# Altium PCB viper_eagle_rep.PcbDoc (part 4 of 4)
Units mm, origin at the board's own origin, x right, y up, seen from the top; angles counter-clockwise.
Board outline 285.4 x 100.18 mm, 2 copper layers (Component Side, Bottom Layer), stack 1.571 mm thick; 351 components, 206 nets, 1213 pads, 248 vias.
Unrouted connection lines stored in the file: 357.
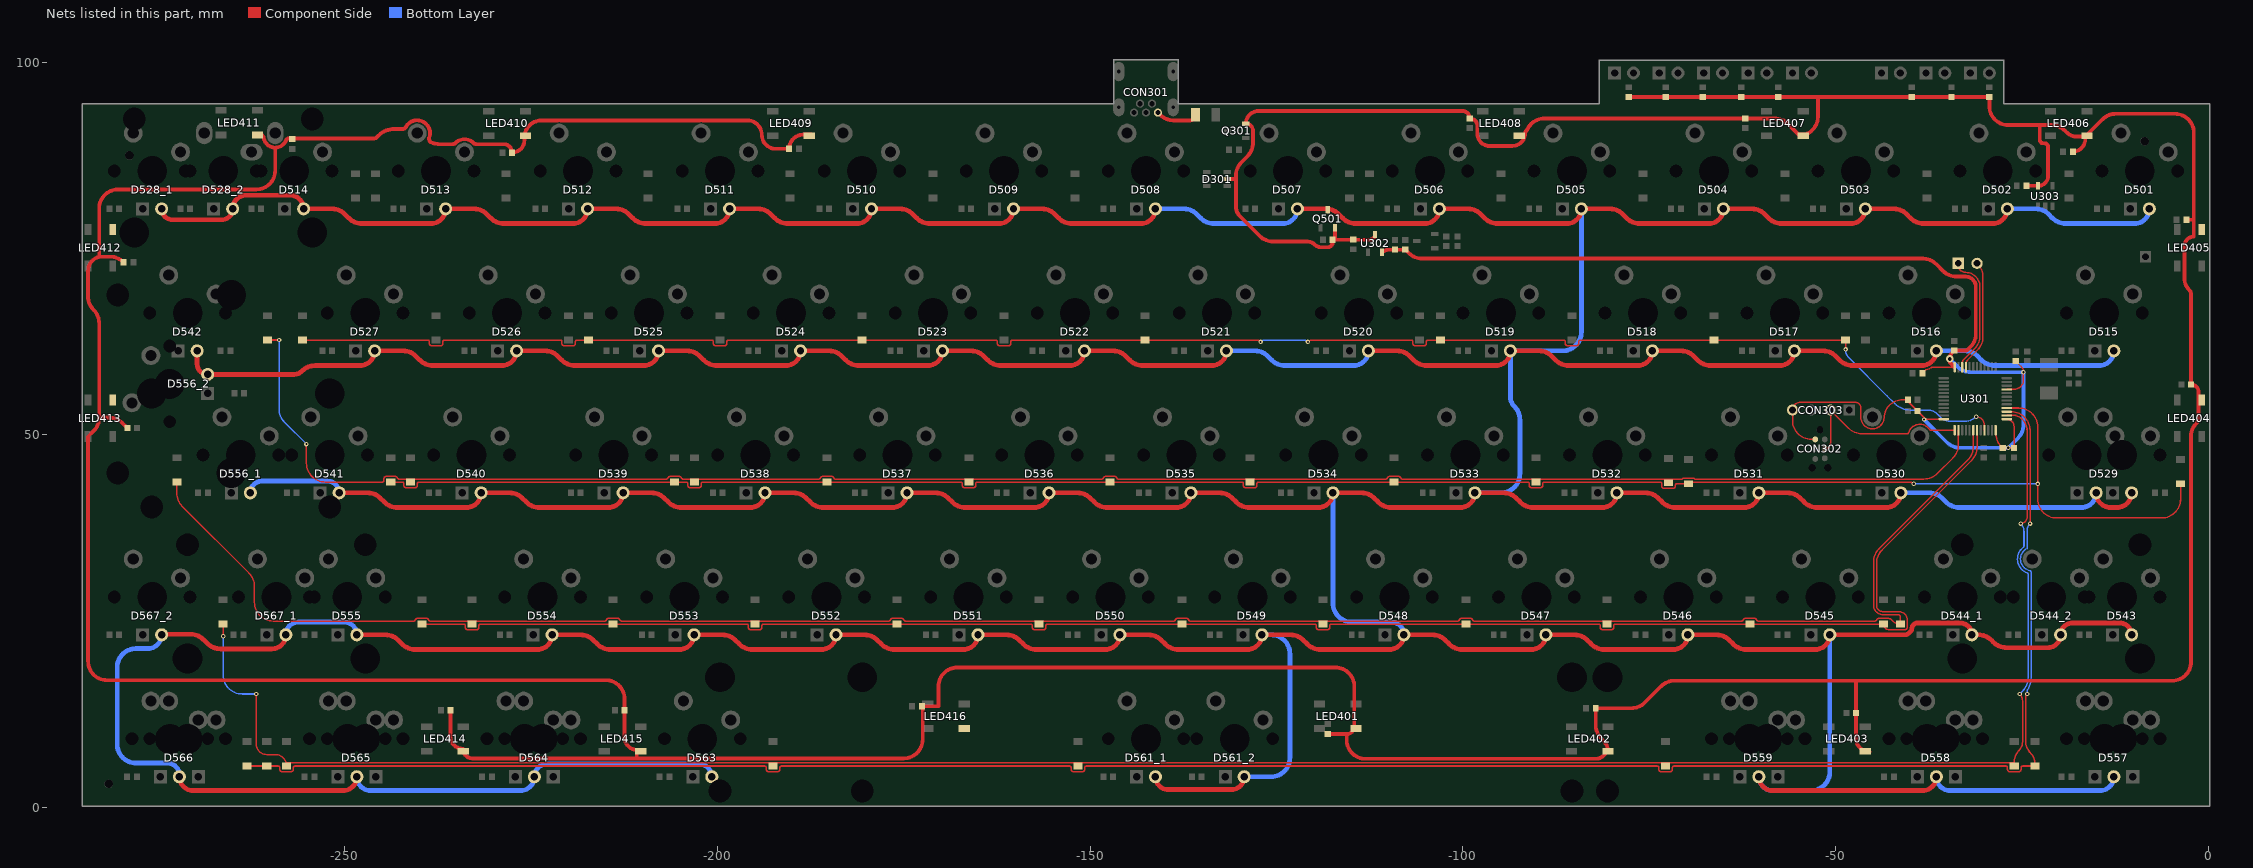
[diagram p3: the nets of this part, all layers, seen from the top]

## Via types
v1: diameter 0.6, hole 0.3, Component Side to Bottom Layer, tented both sides, 247 vias
v2: diameter 1, hole 0.5, Component Side to Bottom Layer, tented both sides, 1 vias

## Nets (pads, with @x,y where several pads share a name; then routed paths per layer and width w, separated by ;. In a path a pad name is that pad's centre, name@x,y a point inside that pad or via, vN(x,y) a via of type N, cw(c..) or ccw(c..) an arc to the next point about the centre after c; other vN are vias at no path point) (continued)
PA14/SWCLK: CON302.4 CON303.3 U301.37 | length 26.6
  Component Side w0.203: -50.673,48.895 cw(c-51.435,48.895) CON302.4@-51.435,48.133 ccw(c-51.435,48.917) -50.651,48.917 -50.651,52.981 cw(c-50.482,52.981) -50.482,53.149 -48.242,50.909 ccw(c-46.446,52.705) -46.446,50.165 -43.434,50.165 -40.376,50.165 ccw(c-40.376,50.368) -40.182,50.309 cw(c-38.677,49.855) -38.608,51.425 ; -39.857,50.893 cw(c-38.677,49.855) -38.608,51.425 ; U301.37@-33.992,50.639 -37.203,50.639 cw(c-37.203,50.842) -37.371,50.729 ccw(c-38.677,49.855) -38.608,51.425
PA15: D230.2 D232.2 D234.2 D236.2 D238.2 D240.2 D242.2 U301.38 | length 248.9
  Component Side w0.203: D242.2@-260.35,62.73 -260.35,62.738 v1(-258.826,62.738) ; v1(-255.143,48.768) -255.143,46.22 ccw(c-252.603,46.22) -252.603,43.68 -244.955,43.68 ccw(c-244.955,43.883) -244.752,43.883 -244.752,44.135 cw(c-244.45,44.135) -244.45,44.437 -243.23,44.437 cw(c-243.23,44.135) -242.942,44.225 ccw(c-242.748,44.286) -242.748,44.083 -242.518,44.083 -239.219,44.083 -238.379,44.083 -206.832,44.083 ccw(c-206.832,44.286) -206.638,44.225 cw(c-206.35,44.135) -206.35,44.437 -205.13,44.437 cw(c-205.13,44.135) -204.842,44.225 ccw(c-204.648,44.286) -204.648,44.083 -203.073,44.083 -196.469,44.083 -186.385,44.083 ccw(c-186.385,44.286) -186.191,44.225 cw(c-185.903,44.135) -185.903,44.437 -184.683,44.437 cw(c-184.683,44.135) -184.395,44.225 ccw(c-184.201,44.286) -184.201,44.083 -173.228,44.083 -169.037,44.083 -164.338,44.083 -148.412,44.083 ccw(c-148.412,44.286) -148.218,44.225 cw(c-147.93,44.135) -147.93,44.437 -146.71,44.437 cw(c-146.71,44.135) -146.422,44.225 ccw(c-146.228,44.286) -146.228,44.083 -144.018,44.083 -111.379,44.083 -110.311,44.083 ccw(c-110.312,44.286) -110.118,44.225 cw(c-109.83,44.135) -109.83,44.437 -108.61,44.437 cw(c-108.61,44.135) -108.322,44.225 ccw(c-108.128,44.286) -108.128,44.083 -102.108,44.083 -70.581,44.083 -70.458,44.207 -68.988,44.207 -68.865,44.083 -38.122,44.083 ccw(c-38.122,46.623) -36.326,44.827 -34.236,46.917 ccw(c-36.032,48.713) -33.492,48.713 U301.38@-33.492,50.639
  Bottom Layer w0.203: v1(-258.826,62.738) -258.826,53.503 ccw(c-256.286,53.503) -258.082,51.707 v1(-255.143,48.768)
PB6: D244.2 D246.2 D248.2 D250.2 D252.2 D254.2 D256.2 U301.42 | length 279
  Component Side w0.203: D256.2@-272.542,43.68 -272.542,42.2 ccw(c-270.002,42.2) -271.798,40.404 -262.872,31.478 cw(c-264.668,29.682) -262.128,29.682 -262.128,27.573 ccw(c-259.588,27.573) -259.588,25.033 -240.741,25.033 ccw(c-240.741,25.236) -240.547,25.175 cw(c-240.259,25.085) -240.259,25.387 -239.039,25.387 cw(c-239.039,25.085) -238.751,25.175 ccw(c-238.557,25.236) -238.557,25.033 -232.918,25.033 -228.473,25.033 -215.087,25.033 ccw(c-215.087,25.236) -214.893,25.175 cw(c-214.605,25.085) -214.605,25.387 -213.385,25.387 cw(c-213.385,25.085) -213.097,25.175 ccw(c-212.903,25.236) -212.903,25.033 -176.987,25.033 ccw(c-176.987,25.236) -176.793,25.175 cw(c-176.505,25.085) -176.505,25.387 -175.285,25.387 cw(c-175.285,25.085) -174.997,25.175 ccw(c-174.803,25.236) -174.803,25.033 -138.76,25.033 ccw(c-138.76,25.236) -138.566,25.175 cw(c-138.278,25.085) -138.278,25.387 -137.058,25.387 cw(c-137.058,25.085) -136.77,25.175 ccw(c-136.576,25.236) -136.576,25.033 -118.745,25.033 -105.156,25.033 -100.66,25.033 ccw(c-100.66,25.236) -100.466,25.175 cw(c-100.178,25.085) -100.178,25.387 -98.958,25.387 cw(c-98.958,25.085) -98.67,25.175 ccw(c-98.476,25.236) -98.476,25.033 -62.56,25.033 ccw(c-62.56,25.236) -62.366,25.175 cw(c-62.078,25.085) -62.078,25.387 -60.858,25.387 cw(c-60.858,25.085) -60.57,25.175 ccw(c-60.376,25.236) -60.376,25.033 -44.653,25.033 ccw(c-44.653,25.236) -44.459,25.175 cw(c-44.171,25.085) -44.171,25.387 -42.951,25.387 cw(c-42.951,24.681) -42.452,25.18 -42.291,25.019 ccw(c-41.352,25.958) -41.352,24.63 D244.2@-41.275,24.63 -41.275,25.551 ccw(c-41.609,25.551) -41.609,25.886 -43.609,25.886 cw(c-43.609,27.153) -44.876,27.153 -44.876,32.944 cw(c-42.336,32.944) -44.132,34.74 -32.236,46.636 ccw(c-34.032,48.432) -31.492,48.432 U301.42@-31.492,50.639
PB7: D243.2 D245.2 D247.2 D249.2 D251.2 D253.2 D267.2 U301.43 | length 240.4
  Component Side w0.203: D267.2@-239.649,24.63 -234.033,24.63 cw(c-234.033,24.427) -233.83,24.427 -233.83,24.175 ccw(c-233.528,24.175) -233.528,23.873 -232.308,23.873 ccw(c-232.308,24.175) -232.006,24.175 -232.006,24.427 cw(c-231.803,24.427) -231.803,24.63 D253.2@-213.995,24.63 -196.06,24.63 cw(c-196.06,24.427) -195.857,24.427 -195.857,24.175 ccw(c-195.555,24.175) -195.555,23.873 -194.335,23.873 ccw(c-194.335,24.175) -194.033,24.175 -194.033,24.427 cw(c-193.83,24.427) -193.83,24.63 D251.2@-175.895,24.63 -157.96,24.63 cw(c-157.96,24.427) -157.757,24.427 -157.757,24.175 ccw(c-157.455,24.175) -157.455,23.873 -156.235,23.873 ccw(c-156.235,24.175) -155.933,24.175 -155.933,24.427 cw(c-155.73,24.427) -155.73,24.63 D249.2@-137.668,24.63 -119.86,24.63 cw(c-119.86,24.427) -119.657,24.427 -119.657,24.175 ccw(c-119.355,24.175) -119.355,23.873 -118.135,23.873 ccw(c-118.135,24.175) -117.833,24.175 -117.833,24.427 cw(c-117.63,24.427) -117.63,24.63 D247.2@-99.568,24.63 -81.76,24.63 cw(c-81.76,24.427) -81.557,24.427 -81.557,24.175 ccw(c-81.255,24.175) -81.255,23.873 -80.035,23.873 ccw(c-80.035,24.175) -79.733,24.175 -79.733,24.427 cw(c-79.53,24.427) -79.53,24.63 D245.2@-61.468,24.63 D243.2@-43.561,24.63 ccw(c-42.804,24.63) -42.804,23.873 -40.665,23.873 ccw(c-40.665,24.175) -40.452,23.961 ccw(c-40.665,24.175) -40.451,23.962 ccw(c-40.665,24.175) -40.363,24.175 -40.363,25.21 ccw(c-41.442,25.21) -41.442,26.289 -43.609,26.289 cw(c-43.609,27.153) -43.678,26.292 cw(c-43.609,27.153) -44.473,27.153 -44.473,32.777 cw(c-41.933,32.777) -43.729,34.573 -31.736,46.566 ccw(c-33.532,48.362) -30.992,48.362 U301.43@-30.992,50.639
PB8: D215.2 D217.2 D219.2 D221.2 D223.2 D225.2 D227.2 U301.45 | length 239.7
  Component Side w0.203: D227.2@-255.651,62.73 -238.859,62.73 cw(c-238.859,62.527) -238.656,62.527 -238.656,62.275 ccw(c-238.354,62.275) -238.354,61.973 -237.134,61.973 ccw(c-237.134,62.275) -236.832,62.275 -236.832,62.611 cw(c-236.659,62.505) -236.749,62.687 cw(c-236.568,62.324) -236.568,62.73 -221.079,62.73 cw(c-221.079,62.527) -220.876,62.527 -220.876,62.275 ccw(c-220.574,62.275) -220.574,61.973 -219.354,61.973 ccw(c-219.354,62.275) -219.052,62.275 -219.052,62.527 cw(c-218.849,62.527) -218.849,62.73 D225.2@-217.297,62.73 -200.759,62.73 cw(c-200.759,62.527) -200.556,62.527 -200.556,62.275 ccw(c-200.254,62.275) -200.254,61.973 -199.034,61.973 ccw(c-199.034,62.275) -198.732,62.275 -198.732,62.527 cw(c-198.529,62.527) -198.529,62.73 D223.2@-180.594,62.73 -162.659,62.73 cw(c-162.659,62.527) -162.456,62.527 -162.456,62.275 ccw(c-162.154,62.275) -162.154,61.973 -160.934,61.973 ccw(c-160.934,62.275) -160.632,62.275 -160.632,62.527 cw(c-160.429,62.527) -160.429,62.73 D221.2@-142.621,62.73 -127.373,62.73 v1(-127.127,62.484) ; v1(-120.777,62.484) -120.67,62.484 -120.424,62.73 -106.906,62.73 cw(c-106.906,62.527) -106.703,62.527 -106.703,62.275 ccw(c-106.401,62.275) -106.401,61.973 -105.181,61.973 ccw(c-105.181,62.275) -104.879,62.275 -104.879,62.527 cw(c-104.676,62.527) -104.676,62.73 D219.2@-102.997,62.73 -86.459,62.73 cw(c-86.459,62.527) -86.256,62.527 -86.256,62.275 ccw(c-85.954,62.275) -85.954,61.973 -84.734,61.973 ccw(c-84.734,62.275) -84.432,62.275 -84.432,62.527 cw(c-84.229,62.527) -84.229,62.73 D217.2@-66.294,62.73 D215.2@-48.641,62.73 ; v1(-48.641,61.468) D215.2@-48.641,62.73 ; D215.2@-48.227,62.73 D215.2@-48.641,62.73 ; v1(-31.115,52.451) cw(c-31.115,51.347) -31.09,52.451 cw(c-31.115,51.347) -30.011,51.371 cw(c-31.115,51.347) -30.011,51.347 U301.45@-30.011,50.658
  Bottom Layer w0.203: v1(-127.127,62.484) -127.02,62.484 -126.788,62.716 -121.116,62.716 -120.884,62.484 v1(-120.777,62.484) ; v1(-48.641,61.468) ccw(c-47.049,61.468) -48.175,60.343 -43.065,55.233 -42.034,54.201 ccw(c-39.953,56.283) -39.953,53.34 -37.614,53.34 cw(c-37.614,51.54) -36.342,52.814 cw(c-37.614,51.54) -36.341,52.813 -35.843,52.314 ccw(c-34.639,53.518) -34.639,51.816 -32.648,51.816 ccw(c-32.648,53.984) v1(-31.115,52.451) ccw(c-32.648,53.984) v1(-31.115,52.451)
PB10: CON101.2 U301.21 | length 15.1
  Component Side w0.203: U301.21@-32.492,59.089 -32.492,59.506 cw(c-31.693,59.506) -32.473,59.677 cw(c-31.693,59.506) -32.258,60.071 -30.946,61.383 ccw(c-32.742,63.18) -30.202,63.18 -30.202,71.186 ccw(c-32.742,71.186) CON101.2@-30.946,72.983 ; CON101.2@-30.988,73.025 CON101.2@-30.946,72.983 ; CON101.2@-30.843,72.88 CON101.2@-30.946,72.983
PB11: CON101.1 U301.22 | length 17.2
  Component Side w0.203: CON101.1@-33.528,73.025 CON101.1@-33.528,73.023 ; U301.22@-32.992,59.089 -32.992,59.542 cw(c-32.11,59.542) -32.977,59.706 cw(c-32.11,59.542) -32.944,59.83 cw(c-32.11,59.542) -32.734,60.166 -31.349,61.55 ccw(c-33.145,63.347) -30.605,63.347 -30.605,69.872 ccw(c-32.536,69.872) -31.221,71.286 ccw(c-32.536,69.872) -32.536,71.803 cw(c-32.536,72.795) CON101.1@-33.394,72.296 ; CON101.1@-33.528,73.023 ccw(c-31.496,73.023) CON101.1@-33.394,72.296 ; CON101.1@-33.528,73.023 -33.528,72.795 ccw(c-32.536,72.795) CON101.1@-33.394,72.296
PC13: D255.2 D258.2 D259.2 D260.2 D261.2 D263.2 U301.2 | length 308.6
  Component Side w0.203: v1(-266.319,22.987) D255.2@-266.319,24.63 ; v1(-261.874,15.24) -261.874,8.509 ccw(c-260.477,8.509) -260.477,7.112 -259.342,7.112 cw(c-259.342,5.58) D263.2@-257.81,5.58 -257.81,5.983 D258.2@-26.001,5.983 ; U301.2@-27.017,52.614 -25.813,52.614 cw(c-25.812,52.411) -25.747,52.603 cw(c-26.416,50.574) -24.838,52.015 cw(c-26.416,50.574) -24.279,50.574 -24.279,38.967 cw(c-25.146,38.967) v1(-25.146,38.1) ; D258.2@-26,5.58 -26,6.171 cw(c-23.951,6.171) -25.4,7.62 ccw(c-26.626,8.846) -24.892,8.846 -24.892,14.32 ccw(c-26.193,14.32) v1(-25.273,15.24)
  Bottom Layer w0.203: v1(-266.319,22.987) -266.319,17.78 ccw(c-263.779,17.78) -263.779,15.24 v1(-261.874,15.24) ; v1(-25.273,15.24) -24.896,15.617 ccw(c-26.692,17.413) -24.152,17.413 -24.152,31.303 ccw(c-24.355,31.304) -24.285,31.494 cw(c-23.596,33.345) -24.776,34.929 ccw(c-24.897,35.092) -24.694,35.093 -24.694,37.009 ccw(c-26.237,37.009) v1(-25.146,38.1)
PC14: D257.2 D262.2 D264.2 U301.3 | length 296.5
  Component Side w0.203: D264.2@-263.144,5.58 D262.2@-260.477,5.58 -258.925,5.58 cw(c-258.925,5.377) -258.722,5.377 -258.722,5.125 ccw(c-258.42,5.125) -258.42,4.823 -257.2,4.823 ccw(c-257.2,5.125) -256.898,5.125 -256.898,5.377 cw(c-256.695,5.377) -256.695,5.58 -193.647,5.58 cw(c-193.647,5.377) -193.444,5.377 -193.444,5.125 ccw(c-193.142,5.125) -193.142,4.823 -191.922,4.823 ccw(c-191.922,5.125) -191.62,5.125 -191.62,5.377 cw(c-191.417,5.377) -191.417,5.58 -152.753,5.58 cw(c-152.753,5.377) -152.55,5.377 -152.55,5.125 ccw(c-152.248,5.125) -152.248,4.823 -151.028,4.823 ccw(c-151.028,5.125) -150.726,5.125 -150.726,5.377 cw(c-150.523,5.377) -150.523,5.58 -73.886,5.58 cw(c-73.886,5.377) -73.683,5.377 -73.683,5.125 ccw(c-73.381,5.125) -73.381,4.823 -72.161,4.823 ccw(c-72.161,5.125) -71.859,5.125 -71.859,5.377 cw(c-71.656,5.377) -71.656,5.58 -27.115,5.58 cw(c-27.115,5.377) -26.912,5.377 -26.912,5.125 ccw(c-26.61,5.125) -26.61,4.823 -25.39,4.823 ccw(c-25.39,5.125) -25.088,5.125 -25.088,5.377 cw(c-24.885,5.377) -24.885,5.58 D257.2@-23.241,5.58 -23.241,6.013 ccw(c-24.975,6.013) -23.749,7.239 -23.755,7.245 cw(c-21.982,9.017) -24.489,9.017 -24.489,14.68 cw(c-23.697,14.68) v1(-24.257,15.24) ; U301.3@-27.017,53.114 -26.416,53.114 cw(c-26.416,50.574) -23.876,50.574 v1(-23.876,38.1)
  Bottom Layer w0.203: v1(-24.257,15.24) -24.257,15.699 cw(c-24.054,15.699) -24.224,15.809 ccw(c-26.692,17.413) -23.749,17.413 -23.749,31.605 ccw(c-23.952,31.606) -23.911,31.805 cw(c-23.596,33.345) -24.291,34.755 -24.291,37.098 cw(c-22.874,37.098) v1(-23.876,38.1)
PC15: D229.2 D231.2 D233.2 D235.2 D237.2 D239.2 D241.2 U301.4 | length 267.4
  Component Side w0.203: D241.2@-243.84,43.68 -242.435,43.68 ; v1(-39.497,43.45) ccw(c-40.052,42.895) -40.052,43.68 -69.168,43.68 ccw(c-69.168,42.895) D231.2@-69.723,43.45 -71.275,43.45 ccw(c-71.275,43.247) -71.478,43.247 -71.478,43.122 cw(c-71.78,43.122) -71.78,42.82 -73,42.82 cw(c-73,43.122) -73.302,43.122 -73.302,43.477 ccw(c-73.505,43.477) -73.505,43.68 -89.055,43.68 ccw(c-89.055,43.477) -89.258,43.477 -89.258,43.225 cw(c-89.56,43.225) -89.56,42.923 -90.78,42.923 cw(c-90.78,43.225) -91.082,43.225 -91.082,43.477 ccw(c-91.285,43.477) -91.285,43.68 D233.2@-109.22,43.68 -127.409,43.68 ccw(c-127.409,43.477) -127.612,43.477 -127.612,43.225 cw(c-127.914,43.225) -127.914,42.923 -129.134,42.923 cw(c-129.134,43.225) -129.436,43.225 -129.436,43.477 ccw(c-129.639,43.477) -129.639,43.68 D235.2@-147.32,43.68 -165.128,43.68 ccw(c-165.128,43.477) -165.331,43.477 -165.331,43.225 cw(c-165.633,43.225) -165.633,42.923 -166.853,42.923 cw(c-166.853,43.225) -167.155,43.225 -167.155,43.477 ccw(c-167.358,43.477) -167.358,43.68 D237.2@-185.293,43.68 -201.958,43.68 ccw(c-201.958,43.477) -202.161,43.477 -202.161,43.225 cw(c-202.463,43.225) -202.463,42.923 -203.683,42.923 cw(c-203.683,43.225) -203.985,43.225 -203.985,43.477 ccw(c-204.188,43.477) -204.188,43.68 D239.2@-205.74,43.68 -240.058,43.68 ccw(c-240.058,43.477) -240.261,43.477 -240.261,43.225 cw(c-240.563,43.225) -240.563,42.923 -241.783,42.923 cw(c-241.783,43.225) -242.085,43.225 -242.085,43.464 ; U301.4@-27.017,53.614 -25.4,53.614 cw(c-25.4,51.074) -22.86,51.074 v1(-22.86,43.434) -22.86,41.402 ccw(c-20.32,41.402) -20.32,38.862 -6.223,38.862 ccw(c-6.223,41.402) -3.683,41.402 D229.2@-3.683,43.45 ; -242.435,43.68 cw(c-242.435,42.545) -242.255,43.666 cw(c-242.288,43.465) -242.085,43.466 ; -242.435,43.68 -242.288,43.68 cw(c-242.288,43.477) -242.085,43.477 -242.085,43.466 ; -242.085,43.464 ccw(c-242.288,43.465) -242.085,43.466 ; -242.085,43.464 -242.085,43.466
  Bottom Layer w0.203: v1(-39.497,43.45) v1@-22.86,43.45
RAW: CON301.1 F301.2 | length 5.8
  Component Side w0.508: CON301.1@-140.9,93.25 -140.588,92.938 ccw(c-138.811,94.715) -138.811,92.202 -136.605,92.202 ccw(c-136.605,92.964) F301.2@-135.843,92.964
VCC3V3: C301.2 C302.2 C303.2 C304.2 C305.2 C306.2 C311.2 C312.2 CON302.1 CON303.1 R302.1 U301.1 U301.9 U301.24 U301.36 U301.48 U302.2 | length 181.4
  Component Side w0.203: CON302.1@-52.705,49.403 -53.213,49.403 cw(c-53.213,51.943) -55.753,51.943 CON303.1@-55.753,53.34 cw(c-54.701,53.34) -54.701,54.392 -51.816,54.392 -48.884,54.392 -47.383,54.392 cw(c-47.383,53.596) -46.587,53.596 -46.587,52.604 cw(c-46.79,52.603) -46.588,52.579 ccw(c-45.027,52.395) -46.593,52.535 ccw(c-45.027,52.395) -46.593,52.533 ccw(c-45.027,52.395) -46.552,52.013 ccw(c-45.027,52.395) -45.511,50.9 ccw(c-45.027,52.395) -43.995,51.21 ; -44.406,50.952 ccw(c-45.027,52.395) -43.995,51.21 ; C304.2@-38.339,58.293 -37.926,58.706 cw(c-37.782,58.563) -37.829,58.761 ccw(c-38.431,61.285) -37.175,59.014 ccw(c-38.431,61.285) -37.095,59.06 cw(c-36.991,58.886) -36.994,59.089 U301.24@-33.992,59.089 ; U301.36@-35.467,52.114 -35.478,52.103 -37.889,52.103 -40.098,54.312 cw(c-39.673,54.737) R302.1@-40.274,54.737 -40.944,54.737 ccw(c-40.944,52.197) -43.459,52.556 ccw(c-43.258,52.527) -43.46,52.512 cw(c-45.027,52.395) -43.484,52.099 cw(c-45.027,52.395) -43.484,52.098 cw(c-45.027,52.395) -43.995,51.21 ; U301.48@-28.492,50.639 -28.492,50.26 ccw(c-25.952,50.26) -27.748,48.464 C312.2@-27.559,48.275 v1(-26.797,48.275) C305.2@-26.035,48.275 -26.035,51.132 ccw(c-27.017,51.132) U301.1@-27.017,52.114 ; U301.9@-27.017,56.114 -26.035,56.114 ccw(c-26.035,57.384) -25.652,56.173 ccw(c-26.035,57.384) -24.824,57.001 ccw(c-26.035,57.384) -24.765,57.384 v1(-24.765,58.42) ccw(c-25.861,58.42) -25.086,59.195 C303.2@-25.781,59.89 C303.2@-25.756,59.89
  Component Side w0.508: U302.2@-110.81,74.492 cw(c-109.919,73.601) -109.919,74.861 C311.2@-109.093,74.861 C302.2@-107.696,74.861 -107.239,74.404 ccw(c-105.443,76.2) -105.443,73.66 -38.263,73.66 cw(c-38.263,71.12) -37.804,73.618 cw(c-38.263,71.12) -36.467,72.916 -35.542,71.991 ccw(c-33.746,73.787) -33.746,71.247 -32.536,71.247 cw(c-32.536,69.872) -31.16,69.872 -31.16,63.509 cw(c-33.537,63.509) -31.856,61.828 -32.209,61.476 cw(c-32.569,61.834) -32.569,61.326 C306.2@-34.036,61.326 -34.322,61.04 ccw(c-33.481,60.198) v2(-34.671,60.198) -34.671,59.768 -34.163,59.26 ccw(c-33.992,59.26) U301.24@-34.096,59.124
  Bottom Layer w0.508: v1(-38.1,52.07) -35.049,49.019 ccw(c-33.253,50.815) -33.253,48.275 v1(-26.797,48.275) -25.509,49.563 ccw(c-27.305,51.359) -24.765,51.359 v1(-24.765,58.42) -31.841,58.42 cw(c-31.841,60.96) -33.637,59.164 v2(-34.671,60.198)
VCC5V: C310.2 C313.2 C401.2 C402.2 C403.2 C404.2 C405.2 C406.2 C407.2 C408.2 C409.2 C410.2 C411.2 C412.2 C413.2 C414.2 C415.2 C416.2 D301.5 LED401.1 LED402.1 LED403.1 LED404.1 LED405.1 LED406.1 LED407.1 LED408.1 LED409.1 LED410.1 LED411.1 LED412.1 LED413.1 LED414.1 LED415.1 LED416.1 Q301.2 Q501.2 R401.1 R402.1 R403.1 R404.1 R405.1 R406.1 R407.1 R408.1 R568.2 U302.3 U303.5 | length 849.1
  Component Side w0.508: C412.2@-279.669,73.152 -279.687,73.17 ccw(c-281.483,71.374) -281.483,73.914 -282.575,73.914 ; C413.2@-279.161,50.927 -279.812,51.578 ccw(c-281.608,49.782) -281.608,52.322 -282.956,52.322 ; LED411.1@-261.71,90.298 -261.381,90.298 cw(c-261.379,89.79) -260.877,89.865 ccw(c-259.34,90.095) -257.972,89.358 ; -259.334,88.519 -259.334,85.48 cw(c-261.874,85.48) -261.874,82.94 -280.416,82.94 ccw(c-280.416,80.4) -282.956,80.4 -282.956,74.041 ccw(c-282.829,74.041) -282.829,73.914 -282.575,73.914 ; -257.909,89.489 cw(c-257.441,89.291) -257.541,89.789 -255.27,89.789 -246.071,89.789 ccw(c-246.071,90.297) -245.685,89.967 cw(c-243.332,87.955) -245.227,90.403 cw(c-243.332,87.955) -243.332,91.051 -242.252,91.051 ccw(c-242.252,91.559) -241.806,91.317 cw(c-240.29,90.495) -239.833,92.157 cw(c-240.29,90.495) -238.67,89.905 ccw(c-238.193,89.731) -238.42,89.277 ccw(c-237.293,91.553) -237.293,89.013 -235.53,89.013 ccw(c-235.53,89.521) -235.168,89.165 cw(c-233.94,87.955) -232.712,89.165 ccw(c-232.35,89.521) -232.35,89.013 -230.796,89.013 -228.698,89.013 cw(c-228.698,87.884) C410.2@-227.569,87.884 ccw(c-227.569,89.557) -225.896,89.557 -225.896,89.917 cw(c-223.611,89.917) -223.611,92.202 -221.515,92.202 ccw(c-221.515,92.71) -221.452,92.206 cw(c-221.24,90.495) -221.028,92.206 ccw(c-220.965,92.71) -220.965,92.202 -202.465,92.202 ccw(c-202.465,92.71) -202.402,92.206 cw(c-202.19,90.495) -201.978,92.206 ccw(c-201.915,92.71) -201.915,92.202 -199.771,92.202 -195.961,92.202 cw(c-195.961,90.297) -194.056,90.297 ccw(c-192.151,90.297) -192.151,88.392 C409.2@-190.373,88.392 cw(c-188.467,88.392) -188.467,90.298 LED409.1@-187.415,90.298 ; C414.2@-235.824,13.081 -235.824,9.548 ccw(c-234.151,9.548) -235.79,9.214 ccw(c-234.151,9.548) -234.485,7.909 ccw(c-234.151,9.548) -234.151,7.875 ccw(c-232.88,7.875) -232.88,6.604 -210.82,6.604 ; D301.5@-131.594,84.328 -130.429,84.328 ; C401.2@-118.11,9.891 -115.597,9.891 cw(c-115.597,9.869) -115.575,9.869 ; Q501.2@-117.16,77.794 -117.16,76.5 cw(c-117.46,76.5) R568.2@-117.46,76.2 ; U302.3@-111.76,76.892 cw(c-112.452,76.892) -112.452,76.2 R568.2@-117.46,76.2 ; LED402.1@-80.519,7.565 ccw(c-82.496,7.565) -80.608,8.15 ; R408.1@-77.851,95.35 R407.1@-72.771,95.35 R406.1@-67.818,95.35 R405.1@-62.611,95.35 -52.324,95.35 ; LED403.1@-45.429,7.494 cw(c-45.429,9.309) -47.244,9.309 -47.244,17.018 ; C313.2@-24.369,83.439 -22.816,83.439 cw(c-22.816,83.417) U303.5@-22.794,83.417 ccw(c-22.794,84.748) -21.463,84.748 -21.463,88.632 ccw(c-21.971,88.632) -21.971,89.14 -22.123,89.14 cw(c-22.123,89.594) -22.577,89.594 -22.577,91.567 ; C406.2@-18.146,88.011 ccw(c-18.146,89.684) -16.473,89.684 LED406.1@-16.473,90.044 ; C405.2@-2.906,78.867 -1.906,78.867 ; -282.956,52.322 cw(c-285.496,52.322) -283.7,50.526 -284.479,49.747 cw(c-284.479,48.478) -284.45,49.747 -284.45,19.631 ccw(c-281.91,19.631) -281.91,17.091 -214.996,17.091 cw(c-214.996,14.551) -212.456,14.551 C415.2@-212.456,13.081 -212.456,9.421 ccw(c-210.783,9.421) -210.783,7.748 ccw(c-210.783,7.711) -210.82,7.711 -210.82,6.604 ; -282.956,52.322 -282.956,64.988 ccw(c-285.496,64.988) -283.7,66.784 -283.718,66.802 cw(c-281.951,68.569) -284.45,68.569 -284.45,71.718 -284.45,72.039 cw(c-282.575,72.039) -282.575,73.914 ; -210.82,6.604 -175.006,6.604 ccw(c-175.006,9.144) -172.466,9.144 -172.466,13.462 cw(c-172.34,13.462) -172.34,13.588 -170.344,13.588 -170.344,16.256 cw(c-167.804,16.256) -167.804,18.796 -117.094,18.796 cw(c-117.094,16.256) -114.554,16.256 -114.554,10.89 cw(c-115.575,10.89) -115.575,9.869 ; -130.429,84.328 -130.429,84.8 cw(c-127.889,84.8) -129.685,86.596 -128.887,87.394 ccw(c-130.683,89.19) -128.143,89.19 -128.143,90.796 ccw(c-129.102,90.796) Q301.2@-129.102,91.755 cw(c-127.385,91.755) -127.385,93.472 -100.061,93.472 cw(c-100.061,92.471) C408.2@-99.06,92.471 cw(c-99.06,91.455) -98.044,91.455 -98.044,90.424 ccw(c-96.393,90.424) -96.393,88.773 -93.349,88.773 ccw(c-93.349,90.505) -91.617,90.505 cw(c-91.111,90.469) -91.463,90.835 ccw(c-91.99,91.381) -91.308,91.049 cw(c-89.027,89.931) -91.005,91.524 cw(c-89.027,89.931) -89.027,92.471 C407.2@-62.103,92.471 -58.179,92.471 cw(c-58.179,89.931) -56.383,91.727 -54.954,90.298 -54.437,90.298 ccw(c-54.437,92.029) -53.213,90.805 -53.068,90.95 ccw(c-54.864,92.746) -52.327,92.625 ccw(c-54.864,92.746) -52.324,92.746 -52.324,95.35 ; -130.429,84.328 -130.429,80.601 ccw(c-128.695,80.601) -129.921,79.375 -127.236,76.69 ccw(c-125.44,78.486) -125.44,75.946 -120.808,75.946 cw(c-120.808,74.645) -119.888,75.565 ccw(c-118.968,76.485) -118.968,75.184 -118.11,75.184 ccw(c-118.11,75.834) -117.46,75.834 R568.2@-117.46,76.2 ; -115.575,9.869 -115.575,9.079 ccw(c-113.035,9.079) -113.035,6.539 -85.598,6.539 -84.206,6.539 -82.198,6.539 ccw(c-82.198,8.129) -80.608,8.129 -80.608,8.15 ; -80.608,8.15 ccw(c-82.496,7.565) -81.098,8.962 -81.41,9.274 cw(c-79.614,11.07) -82.154,11.07 C402.2@-82.154,13.335 -77.379,13.335 ccw(c-77.379,15.875) -75.583,14.079 -73.388,16.274 cw(c-71.592,14.478) -71.592,17.018 -47.244,17.018 ; -52.324,95.35 R403.1@-39.751,95.35 R401.1@-29.337,95.35 -29.337,94.107 ccw(c-26.797,94.107) -26.797,91.567 -22.577,91.567 ; -47.244,17.018 -4.826,17.018 ccw(c-4.826,19.558) -2.286,19.558 -2.286,49.902 cw(c-0.118,49.902) -1.651,51.435 ccw(c-2.568,52.352) -1.271,52.352 -1.271,55.769 ccw(c-2.271,55.769) C404.2@-2.271,56.769 -2.271,68.82 ccw(c-3.189,68.82) -2.54,69.469 cw(c-1.007,71.002) -3.175,71.002 -3.175,75.349 cw(c-1.906,75.349) -1.906,76.618 -1.906,78.867 ; -22.577,91.567 -20.991,91.567 cw(c-20.991,89.027) -19.195,90.823 -18.923,90.551 ccw(c-17.699,91.775) -17.699,90.044 LED406.1@-16.473,90.044 ; LED406.1@-16.473,90.044 -14.17,92.347 cw(c-12.374,90.551) -13.301,92.916 cw(c-12.374,90.551) -12.374,93.091 -4.446,93.091 cw(c-4.446,90.551) -1.906,90.551 -1.906,78.867
VCC_EXT: D501.1 D502.1 D503.1 D504.1 D505.1 D506.1 D507.1 D508.1 D509.1 D510.1 D511.1 D512.1 D513.1 D514.1 D515.1 D516.1 D517.1 D518.1 D519.1 D520.1 D521.1 D522.1 D523.1 D524.1 D525.1 D526.1 D527.1 D528_1.1 D528_2.1 D529.1 D530.1 D531.1 D532.1 D533.1 D534.1 D535.1 D536.1 D537.1 D538.1 D539.1 D540.1 D541.1 D542.1 D543.1 D544_1.1 D544_2.1 D545.1 D546.1 D547.1 D548.1 D549.1 D550.1 D551.1 D552.1 D553.1 D554.1 D555.1 D556_1.1 D556_2.1 D557.1 D558.1 D559.1 D561_1.1 D561_2.1 D563.1 D564.1 D565.1 D566.1 D567_1.1 D567_2.1 Q501.3 | length 1451.3
  Component Side w0.635: D528_1.1@-274.574,80.335 ccw(c-273.106,80.335) -273.106,78.867 -266.517,78.867 ccw(c-266.517,80.335) D528_2.1@-265.049,80.335 cw(c-263.215,80.335) -263.215,82.169 -257.364,82.169 cw(c-257.364,80.335) D514.1@-255.53,80.335 -251.704,80.335 cw(c-251.704,77.925) -250,79.629 -249.474,79.103 ccw(c-247.678,80.899) -247.678,78.359 -238.456,78.359 ccw(c-238.456,80.335) D513.1@-236.48,80.335 -232.654,80.335 cw(c-232.654,77.925) -230.95,79.629 -230.424,79.103 ccw(c-228.628,80.899) -228.628,78.359 -219.406,78.359 ccw(c-219.406,80.335) D512.1@-217.43,80.335 -213.604,80.335 cw(c-213.604,77.925) -211.9,79.629 -211.374,79.103 ccw(c-209.578,80.899) -209.578,78.359 -200.356,78.359 ccw(c-200.356,80.335) D511.1@-198.38,80.335 -194.554,80.335 cw(c-194.554,77.925) -192.85,79.629 -192.324,79.103 ccw(c-190.528,80.899) -190.528,78.359 -181.306,78.359 ccw(c-181.306,80.335) D510.1@-179.33,80.335 -175.504,80.335 cw(c-175.504,77.925) -173.8,79.629 -173.274,79.103 ccw(c-171.478,80.899) -171.478,78.359 -162.256,78.359 ccw(c-162.256,80.335) D509.1@-160.28,80.335 -156.454,80.335 cw(c-156.454,77.925) -154.75,79.629 -154.224,79.103 ccw(c-152.428,80.899) -152.428,78.359 -143.206,78.359 ccw(c-143.206,80.335) D508.1@-141.23,80.335 ; D567_2.1@-274.514,23.266 -270.688,23.266 cw(c-270.688,20.856) -268.983,22.56 -268.457,22.034 ccw(c-266.661,23.83) -266.661,21.29 -259.805,21.29 ccw(c-259.805,23.185) D567_1.1@-257.91,23.185 ; D566.1@-272.198,4.135 ccw(c-270.349,4.135) -270.349,2.286 -250.229,2.286 ccw(c-250.229,4.135) D565.1@-248.38,4.135 ; D542.1@-269.817,61.285 -269.817,59.532 ccw(c-268.4,59.532) D556_2.1@-268.4,58.115 -256.821,58.115 ccw(c-256.821,59.59) -255.778,58.547 -255.76,58.565 cw(c-253.964,56.769) -253.964,59.309 -247.981,59.309 ccw(c-247.981,61.285) D527.1@-246.005,61.285 -242.179,61.285 cw(c-242.179,58.875) -240.475,60.579 -239.949,60.053 ccw(c-238.153,61.849) -238.153,59.309 -228.931,59.309 ccw(c-228.931,61.285) D526.1@-226.955,61.285 -223.129,61.285 cw(c-223.129,58.875) -221.425,60.579 -220.899,60.053 ccw(c-219.103,61.849) -219.103,59.309 -209.881,59.309 ccw(c-209.881,61.285) D525.1@-207.905,61.285 -204.079,61.285 cw(c-204.079,58.875) -202.375,60.579 -201.849,60.053 ccw(c-200.053,61.849) -200.053,59.309 -190.831,59.309 ccw(c-190.831,61.285) D524.1@-188.855,61.285 -185.029,61.285 cw(c-185.029,58.875) -183.325,60.579 -182.799,60.053 ccw(c-181.003,61.849) -181.003,59.309 -171.781,59.309 ccw(c-171.781,61.285) D523.1@-169.805,61.285 -165.979,61.285 cw(c-165.979,58.875) -164.275,60.579 -163.749,60.053 ccw(c-161.953,61.849) -161.953,59.309 -152.731,59.309 ccw(c-152.731,61.285) D522.1@-150.755,61.285 -146.929,61.285 cw(c-146.929,58.875) -145.225,60.579 -144.699,60.053 ccw(c-142.903,61.849) -142.903,59.309 -133.681,59.309 ccw(c-133.681,61.285) D521.1@-131.705,61.285 ; D541.1@-250.767,42.235 D541.1@-250.761,42.235 -246.942,42.235 cw(c-246.942,39.825) -245.237,41.529 -244.711,41.003 ccw(c-242.915,42.799) -242.915,40.259 -233.694,40.259 ccw(c-233.694,42.235) D540.1@-231.717,42.235 -227.892,42.235 cw(c-227.892,39.825) -226.187,41.529 -225.661,41.003 ccw(c-223.865,42.799) -223.865,40.259 -214.644,40.259 ccw(c-214.644,42.235) D539.1@-212.667,42.235 -208.842,42.235 cw(c-208.842,39.825) -207.137,41.529 -206.611,41.003 ccw(c-204.815,42.799) -204.815,40.259 -195.594,40.259 ccw(c-195.594,42.235) D538.1@-193.617,42.235 -189.792,42.235 cw(c-189.792,39.825) -188.087,41.529 -187.561,41.003 ccw(c-185.765,42.799) -185.765,40.259 -176.544,40.259 ccw(c-176.544,42.235) D537.1@-174.567,42.235 -170.742,42.235 cw(c-170.742,39.825) -169.037,41.529 -168.511,41.003 ccw(c-166.715,42.799) -166.715,40.259 -157.494,40.259 ccw(c-157.494,42.235) D536.1@-155.517,42.235 -151.692,42.235 cw(c-151.692,39.825) -149.987,41.529 -149.461,41.003 ccw(c-147.665,42.799) -147.665,40.259 -138.444,40.259 ccw(c-138.444,42.235) D535.1@-136.467,42.235 -132.642,42.235 cw(c-132.642,39.825) -130.937,41.529 -130.411,41.003 ccw(c-128.615,42.799) -128.615,40.259 -119.394,40.259 ccw(c-119.394,42.235) D534.1@-117.417,42.235 -113.592,42.235 cw(c-113.592,39.825) -111.887,41.529 -111.361,41.003 ccw(c-109.565,42.799) -109.565,40.259 -100.344,40.259 ccw(c-100.344,42.235) D533.1@-98.367,42.235 -94.542,42.235 cw(c-94.542,39.825) -92.837,41.529 -92.311,41.003 ccw(c-90.515,42.799) -90.515,40.259 -81.294,40.259 ccw(c-81.294,42.235) D532.1@-79.317,42.235 -75.492,42.235 cw(c-75.492,39.825) -73.787,41.529 -73.261,41.003 ccw(c-71.465,42.799) -71.465,40.259 -62.244,40.259 ccw(c-62.244,42.235) D531.1@-60.267,42.235 -56.442,42.235 cw(c-56.442,39.825) -54.737,41.529 -54.211,41.003 ccw(c-52.415,42.799) -52.415,40.259 -43.194,40.259 ccw(c-43.194,42.235) D530.1@-41.217,42.235 ; D555.1@-248.385,23.185 -244.559,23.185 cw(c-244.559,20.775) -242.855,22.479 -242.329,21.953 ccw(c-240.533,23.749) -240.533,21.209 -224.168,21.209 ccw(c-224.168,23.185) D554.1@-222.192,23.185 -218.366,23.185 cw(c-218.366,20.775) -216.662,22.479 -216.136,21.953 ccw(c-214.34,23.749) -214.34,21.209 -205.118,21.209 ccw(c-205.118,23.185) D553.1@-203.142,23.185 -199.316,23.185 cw(c-199.316,20.775) -197.612,22.479 -197.086,21.953 ccw(c-195.29,23.749) -195.29,21.209 -186.068,21.209 ccw(c-186.068,23.185) D552.1@-184.092,23.185 -180.266,23.185 cw(c-180.266,20.775) -178.562,22.479 -178.036,21.953 ccw(c-176.24,23.749) -176.24,21.209 -167.018,21.209 ccw(c-167.018,23.185) D551.1@-165.042,23.185 -161.216,23.185 cw(c-161.216,20.775) -159.512,22.479 -158.986,21.953 ccw(c-157.19,23.749) -157.19,21.209 -147.968,21.209 ccw(c-147.968,23.185) D550.1@-145.992,23.185 -142.166,23.185 cw(c-142.166,20.775) -140.462,22.479 -139.936,21.953 ccw(c-138.14,23.749) -138.14,21.209 -128.918,21.209 ccw(c-128.918,23.185) D549.1@-126.942,23.185 -123.116,23.185 cw(c-123.116,20.775) -121.412,22.479 -120.886,21.953 ccw(c-119.09,23.749) -119.09,21.209 -109.868,21.209 ccw(c-109.868,23.185) D548.1@-107.892,23.185 -104.066,23.185 cw(c-104.066,20.775) -102.362,22.479 -101.836,21.953 ccw(c-100.04,23.749) -100.04,21.209 -90.818,21.209 ccw(c-90.818,23.185) D547.1@-88.842,23.185 -85.016,23.185 cw(c-85.016,20.775) -83.312,22.479 -82.786,21.953 ccw(c-80.99,23.749) -80.99,21.209 -71.768,21.209 ccw(c-71.768,23.185) D546.1@-69.792,23.185 -65.966,23.185 cw(c-65.966,20.775) -64.262,22.479 -63.736,21.953 ccw(c-61.94,23.749) -61.94,21.209 -52.718,21.209 ccw(c-52.718,23.185) D545.1@-50.742,23.185 -40.696,23.185 ccw(c-40.696,24.003) -40.171,23.375 cw(c-39.764,22.888) -40.157,23.387 ccw(c-40.54,23.873) -40.102,23.436 -39.926,23.612 ccw(c-40.363,24.05) -39.747,23.99 ccw(c-40.363,24.05) -39.745,24.033 cw(c-39.11,24.016) -39.735,24.129 cw(c-38.973,23.99) -38.973,24.765 -33.27,24.765 cw(c-33.27,23.185) D544_1.1@-31.69,23.185 -30.841,23.185 cw(c-30.841,20.645) -29.045,22.441 -28.811,22.207 ccw(c-27.015,24.003) -27.015,21.463 -21.508,21.463 ccw(c-21.508,23.185) D544_2.1@-19.786,23.185 cw(c-18.206,23.185) -18.206,24.765 -11.841,24.765 cw(c-11.841,23.185) D543.1@-10.261,23.185 ; D561_1.1@-141.229,4.135 ccw(c-139.507,4.135) -139.507,2.413 -131.045,2.413 ccw(c-131.045,4.135) D561_2.1@-129.323,4.135 ; D507.1@-122.18,80.335 -118.354,80.335 cw(c-118.354,77.925) -116.65,79.629 -116.124,79.103 ccw(c-114.328,80.899) -114.328,78.359 -105.106,78.359 ccw(c-105.106,80.335) D506.1@-103.13,80.335 -99.304,80.335 cw(c-99.304,77.925) -97.6,79.629 -97.074,79.103 ccw(c-95.278,80.899) -95.278,78.359 -86.056,78.359 ccw(c-86.056,80.335) D505.1@-84.08,80.335 -80.254,80.335 cw(c-80.254,77.925) -78.55,79.629 -78.024,79.103 ccw(c-76.228,80.899) -76.228,78.359 -67.006,78.359 ccw(c-67.006,80.335) D504.1@-65.03,80.335 -61.204,80.335 cw(c-61.204,77.925) -59.5,79.629 -58.974,79.103 ccw(c-57.178,80.899) -57.178,78.359 -47.956,78.359 ccw(c-47.956,80.335) D503.1@-45.98,80.335 -42.154,80.335 cw(c-42.154,77.925) -40.45,79.629 -39.924,79.103 ccw(c-38.128,80.899) -38.128,78.359 -28.906,78.359 ccw(c-28.906,80.335) D502.1@-26.93,80.335 ; D520.1@-112.655,61.285 -108.829,61.285 cw(c-108.829,58.875) -107.125,60.579 -106.599,60.053 ccw(c-104.803,61.849) -104.803,59.309 -95.581,59.309 ccw(c-95.581,61.285) D519.1@-93.605,61.285 -89.779,61.285 cw(c-89.779,58.875) -88.075,60.579 -87.549,60.053 ccw(c-85.753,61.849) -85.753,59.309 -76.531,59.309 ccw(c-76.531,61.285) D518.1@-74.555,61.285 -70.729,61.285 cw(c-70.729,58.875) -69.025,60.579 -68.499,60.053 ccw(c-66.703,61.849) -66.703,59.309 -57.481,59.309 ccw(c-57.481,61.285) D517.1@-55.505,61.285 -51.679,61.285 cw(c-51.679,58.875) -49.975,60.579 -49.449,60.053 ccw(c-47.653,61.849) -47.653,59.309 -38.431,59.309 ccw(c-38.431,61.285) D516.1@-36.455,61.285 ; D559.1@-60.267,4.135 ccw(c-58.418,4.135) -58.418,2.286 -38.298,2.286 ccw(c-38.298,4.135) D558.1@-36.449,4.135 ; D529.1@-15.024,42.235 ccw(c-13.048,42.235) -13.048,40.259 -12.237,40.259 ccw(c-12.237,42.235) D529.1@-10.261,42.235
  Bottom Layer w0.635: D567_2.1@-274.58,23.185 cw(c-276.429,23.185) -276.429,21.336 -278.003,21.336 ccw(c-278.003,18.796) -280.543,18.796 -280.543,8.509 ccw(c-278.003,8.509) -278.003,5.969 -273.812,5.969 cw(c-273.812,4.355) -272.198,4.355 D566.1@-272.198,4.135 ; D556_1.1@-262.68,42.235 cw(c-261.1,42.235) -261.1,43.815 -252.341,43.815 cw(c-252.341,42.235) D541.1@-250.761,42.235 ; D567_1.1@-257.91,23.185 cw(c-256.203,23.185) -256.203,24.892 -250.092,24.892 cw(c-250.092,23.185) D555.1@-248.385,23.185 ; D565.1@-248.391,4.135 ccw(c-246.542,4.135) -246.542,2.286 -226.422,2.286 ccw(c-226.422,4.135) D564.1@-224.573,4.135 cw(c-222.866,4.135) -222.866,5.842 -202.468,5.842 cw(c-202.468,4.135) D563.1@-200.761,4.135 ; D508.1@-141.23,80.335 -137.404,80.335 cw(c-137.404,77.925) -135.7,79.629 -135.174,79.103 ccw(c-133.378,80.899) -133.378,78.359 -124.156,78.359 ccw(c-124.156,80.335) D507.1@-122.18,80.335 ; D521.1@-131.705,61.285 -127.879,61.285 cw(c-127.879,58.875) -126.175,60.579 -125.649,60.053 ccw(c-123.853,61.849) -123.853,59.309 -114.631,59.309 ccw(c-114.631,61.285) D520.1@-112.655,61.285 ; D561_2.1@-129.323,4.135 -125.73,4.135 ccw(c-125.73,6.675) -123.19,6.675 -123.19,20.645 ccw(c-125.73,20.645) -125.73,23.185 D549.1@-126.942,23.185 ; D534.1@-117.417,42.235 -117.417,27.432 ccw(c-114.877,27.432) -114.877,24.892 -109.599,24.892 cw(c-109.599,23.185) D548.1@-107.892,23.185 ; D533.1@-98.367,42.235 -94.869,42.235 ccw(c-94.869,44.775) -92.329,44.775 -92.329,52.034 ccw(c-94.869,52.034) -93.073,53.83 -93.091,53.848 cw(c-91.85,55.089) -93.605,55.089 D519.1@-93.605,61.285 -86.62,61.285 ccw(c-86.62,63.825) -84.08,63.825 D505.1@-84.08,80.335 ; D559.1@-60.267,4.135 ccw(c-58.418,4.135) -58.418,2.286 -53.282,2.286 ccw(c-53.282,4.826) -50.742,4.826 D545.1@-50.742,23.185 ; D530.1@-41.217,42.235 -37.392,42.235 cw(c-37.392,39.825) -35.687,41.529 -35.161,41.003 ccw(c-33.365,42.799) -33.365,40.259 -17,40.259 ccw(c-17,42.235) D529.1@-15.024,42.235 ; D558.1@-36.46,4.135 ccw(c-34.611,4.135) -34.611,2.286 -14.492,2.286 ccw(c-14.492,4.135) D557.1@-12.642,4.135 ; D516.1@-36.455,61.285 -32.629,61.285 cw(c-32.629,58.875) -30.925,60.579 -30.399,60.053 ccw(c-28.603,61.849) -28.603,59.309 -14.619,59.309 ccw(c-14.619,61.285) D515.1@-12.642,61.285 ; D502.1@-26.93,80.335 -23.104,80.335 cw(c-23.104,77.925) -21.4,79.629 -20.874,79.103 ccw(c-19.078,80.899) -19.078,78.359 -9.856,78.359 ccw(c-9.856,80.335) D501.1@-7.88,80.335
pads on no net: CON301.4 CON302.0 CON302.3 CON302.6 D301.1 D301.6 D401. D402. D403. D404. D405. D406. D407. D408. D501. D502. D503. D504. D505. D506. D507. D508. D509. D510. D511. D512. D513. D514. D515. D516. D517. D518. D519. D520. D521. D522. D523. D524. D525. D526. D527. D528_1. D528_2. D529. D530. D531. D532. D533. D534. D535. D536. D537. D538. D539. D540. D541. D542. D543. D544_1. D544_2. D545. D546. D547. D548. D549. D550. D551. D552. D553. D554. D555. D556_1. D556_2. D557. D558. D559. D561_1. D561_2. D563. D564. D565. D566. D567_1. D567_2. S201. S202. S203. S204. S205. S206. S207. S208. S209. S210. S211. S212. S213. S214. S215. S216. S217. S218. S219. S220. S221. S222. S223. S224. S225. S226. S227. S228. S229. S230. S231. S232. S233. S234. S235. S236. S237. S238. S239. S240. S241. S242. S243. S244. S245. S246. S247. S248. S249. S250. S251. S252. S253. S254. S255. S256. S257. S258. S259. S260. S261. S262. S263. S264. S267. U301.15 U301.16
copper on no net: | length 1.2
  Component Side w0.203: -255.37,30.805 ccw(c-255.37,32.338) -254.286,31.254

## Other copper
Component Side:
  pour cut-out: -282.851,0.665 ccw(c-282.85,2.215) -282.85,0.665 -276.189,0.665 cw(c-272.7,-0.52) -269.211,0.665 -189.389,0.665 cw(c-185.9,-0.52) -182.411,0.665 -102.589,0.665 cw(c-99.1,-0.52) -95.511,0.317 cw(c-95.95,0.215) -95.5,0.215 cw(c-95.95,0.215) -96.389,0.113 ccw(c-99.1,-0.52) -101.811,0.115 ccw(c-99.1,-0.52) -101.811,0.113 -101.811,0.115 cw(c-102.25,0.215) -102.25,-0.235 -182.75,-0.235 cw(c-182.75,0.215) -183.189,0.114 cw(c-185.9,-0.52) -183.189,0.113 -183.189,0.114 ccw(c-185.9,-0.52) -188.611,0.113 cw(c-189.05,0.215) -189.05,-0.235 -269.55,-0.235 cw(c-269.55,0.215) -269.989,0.113 ccw(c-272.7,-0.52) -275.411,0.114 ccw(c-272.7,-0.52) -275.411,0.113 -275.411,0.114 cw(c-275.85,0.215) -275.85,-0.235 -282.85,-0.235 cw(c-282.85,2.215) -285.3,2.215 -285.3,40.767 cw(c-284.85,40.767) -285.3,40.769 -285.3,92.415 cw(c-282.85,92.415) -282.85,94.865 cw(c-282.85,94.415) -282.848,94.865 -275.85,94.865 cw(c-275.85,94.415) -275.411,94.516 ccw(c-272.7,95.149) -269.988,94.517 cw(c-269.55,94.415) -269.55,94.865 -189.05,94.865 cw(c-189.05,94.415) -188.611,94.517 ccw(c-185.9,95.149) -183.189,94.516 ccw(c-185.9,95.149) -183.189,94.517 -183.189,94.516 cw(c-182.75,94.415) -182.75,94.865 -102.25,94.865 cw(c-102.25,94.415) -101.811,94.516 cw(c-99.1,95.149) -101.811,94.517 -101.811,94.516 ccw(c-99.1,95.149) -96.389,94.517 cw(c-95.95,94.415) -95.95,94.865 -13.477,94.865 cw(c-13.477,94.415) -13.038,94.516 cw(c-10.327,95.149) -13.038,94.517 -13.038,94.516 ccw(c-10.327,95.149) -7.616,94.517 cw(c-7.177,94.415) -7.164,94.865 cw(c-7.15,94.415) -7.15,94.865 -2.15,94.865 cw(c-2.15,92.415) 0.3,92.415 0.3,39.065 cw(c-0.15,39.065) 0.3,39.062 0.3,2.215 cw(c-2.15,2.215) -2.15,-0.235 -9.15,-0.235 cw(c-9.15,0.215) -9.589,0.113 ccw(c-12.3,-0.52) -15.011,0.113 cw(c-15.45,0.215) -15.889,0.317 cw(c-12.3,-0.52) -8.811,0.665 -2.15,0.665 ccw(c-2.15,2.215) -0.6,2.215 -0.6,39.37 cw(c-0.15,39.37) -0.6,39.373 -0.6,92.415 ccw(c-2.15,92.415) -2.15,93.965 -6.838,93.965 cw(c-10.327,95.149) -13.816,93.965 -95.611,93.965 cw(c-99.1,95.149) -102.589,93.965 -182.411,93.965 cw(c-185.9,95.149) -189.389,93.965 -269.211,93.965 cw(c-272.7,95.149) -276.189,93.965 -282.85,93.965 cw(c-282.85,94.415) -282.851,93.965 cw(c-282.85,92.415) -282.85,93.965 -282.851,93.965 ccw(c-282.85,92.415) -284.4,92.416 cw(c-284.85,92.415) -284.4,92.415 -284.4,39.065 cw(c-284.85,39.065) -284.4,39.063 -284.4,2.215 ccw(c-282.85,2.215)
  pour cut-out: -95.95,-0.235 cw(c-95.95,0.215) -95.95,0.665 -15.45,0.665 cw(c-15.45,0.215) -15,0.215 cw(c-15.45,0.215) -15.45,-0.235
  pour cut-out: -13.837,94.342 ccw(c-10.3,95.149) -6.754,94.388 ccw(c-6.878,94.415) -6.751,94.415 ccw(c-6.878,94.415) -6.878,94.542 -13.668,94.542 ccw(c-13.668,94.415) -13.777,94.48 ccw(c-13.713,94.37)
  pour cut-out: -276.23,94.342 ccw(c-272.694,95.149) -269.147,94.388 ccw(c-269.272,94.415) -269.144,94.415 ccw(c-269.272,94.415) -269.272,94.542 -276.061,94.542 ccw(c-276.061,94.415) -276.171,94.48 ccw(c-276.106,94.37)
  pour cut-out: -189.43,94.342 ccw(c-185.894,95.149) -182.347,94.388 ccw(c-182.472,94.415) -182.344,94.415 ccw(c-182.472,94.415) -182.472,94.542 -189.261,94.542 ccw(c-189.261,94.415) -189.371,94.48 ccw(c-189.306,94.37)
  pour cut-out: -102.63,94.342 ccw(c-99.094,95.149) -95.547,94.388 ccw(c-95.672,94.415) -95.544,94.415 ccw(c-95.672,94.415) -95.672,94.542 -102.461,94.542 ccw(c-102.461,94.415) -102.571,94.48 ccw(c-102.506,94.37)
  pour cut-out: -269.158,0.288 ccw(c-272.694,-0.519) -276.241,0.242 ccw(c-276.116,0.215) -276.244,0.215 ccw(c-276.116,0.215) -276.116,0.088 -269.327,0.088 ccw(c-269.327,0.215) -269.217,0.15 ccw(c-269.282,0.26)
  pour cut-out: -182.358,0.288 ccw(c-185.894,-0.519) -189.441,0.242 ccw(c-189.316,0.215) -189.444,0.215 ccw(c-189.316,0.215) -189.316,0.088 -182.527,0.088 ccw(c-182.527,0.215) -182.417,0.15 ccw(c-182.482,0.26)
  pour cut-out: -8.758,0.288 ccw(c-12.294,-0.519) -15.841,0.242 ccw(c-15.716,0.215) -15.844,0.215 ccw(c-15.716,0.215) -15.716,0.088 -8.927,0.088 ccw(c-8.927,0.215) -8.817,0.15 ccw(c-8.882,0.26)
  pour cut-out: -95.558,0.288 ccw(c-99.094,-0.519) -102.641,0.242 ccw(c-102.516,0.215) -102.644,0.215 ccw(c-102.516,0.215) -102.516,0.088 -95.727,0.088 ccw(c-95.727,0.215) -95.617,0.15 ccw(c-95.682,0.26)
  pour cut-out: -13.83,94.342 ccw(c-10.294,95.149) -6.747,94.388 ccw(c-6.872,94.415) -6.744,94.415 ccw(c-6.872,94.415) -6.872,94.542 -13.661,94.542 ccw(c-13.661,94.415) -13.771,94.48 ccw(c-13.706,94.37)
Bottom Layer:
  pour cut-out: -282.851,0.665 ccw(c-282.85,2.215) -282.85,0.665 -276.189,0.665 cw(c-272.7,-0.52) -269.211,0.665 -189.389,0.665 cw(c-185.9,-0.52) -182.411,0.665 -102.589,0.665 cw(c-99.1,-0.52) -95.511,0.317 cw(c-95.95,0.215) -95.5,0.215 cw(c-95.95,0.215) -96.389,0.113 ccw(c-99.1,-0.52) -101.811,0.115 ccw(c-99.1,-0.52) -101.811,0.113 -101.811,0.115 cw(c-102.25,0.215) -102.25,-0.235 -182.75,-0.235 cw(c-182.75,0.215) -183.189,0.114 cw(c-185.9,-0.52) -183.189,0.113 -183.189,0.114 ccw(c-185.9,-0.52) -188.611,0.113 cw(c-189.05,0.215) -189.05,-0.235 -269.55,-0.235 cw(c-269.55,0.215) -269.989,0.113 ccw(c-272.7,-0.52) -275.411,0.114 ccw(c-272.7,-0.52) -275.411,0.113 -275.411,0.114 cw(c-275.85,0.215) -275.85,-0.235 -282.85,-0.235 cw(c-282.85,2.215) -285.3,2.215 -285.3,40.767 cw(c-284.85,40.767) -285.3,40.769 -285.3,92.415 cw(c-282.85,92.415) -282.85,94.865 cw(c-282.85,94.415) -282.848,94.865 -275.85,94.865 cw(c-275.85,94.415) -275.411,94.516 ccw(c-272.7,95.149) -269.988,94.517 cw(c-269.55,94.415) -269.55,94.865 -189.05,94.865 cw(c-189.05,94.415) -188.611,94.517 ccw(c-185.9,95.149) -183.189,94.516 ccw(c-185.9,95.149) -183.189,94.517 -183.189,94.516 cw(c-182.75,94.415) -182.75,94.865 -102.25,94.865 cw(c-102.25,94.415) -101.811,94.516 cw(c-99.1,95.149) -101.811,94.517 -101.811,94.516 ccw(c-99.1,95.149) -96.389,94.517 cw(c-95.95,94.415) -95.95,94.865 -13.477,94.865 cw(c-13.477,94.415) -13.038,94.516 cw(c-10.327,95.149) -13.038,94.517 -13.038,94.516 ccw(c-10.327,95.149) -7.616,94.517 cw(c-7.177,94.415) -7.164,94.865 cw(c-7.15,94.415) -7.15,94.865 -2.15,94.865 cw(c-2.15,92.415) 0.3,92.415 0.3,39.065 cw(c-0.15,39.065) 0.3,39.062 0.3,2.215 cw(c-2.15,2.215) -2.15,-0.235 -9.15,-0.235 cw(c-9.15,0.215) -9.589,0.113 ccw(c-12.3,-0.52) -15.011,0.113 cw(c-15.45,0.215) -15.889,0.317 cw(c-12.3,-0.52) -8.811,0.665 -2.15,0.665 ccw(c-2.15,2.215) -0.6,2.215 -0.6,39.37 cw(c-0.15,39.37) -0.6,39.373 -0.6,92.415 ccw(c-2.15,92.415) -2.15,93.965 -6.838,93.965 cw(c-10.327,95.149) -13.816,93.965 -95.611,93.965 cw(c-99.1,95.149) -102.589,93.965 -182.411,93.965 cw(c-185.9,95.149) -189.389,93.965 -269.211,93.965 cw(c-272.7,95.149) -276.189,93.965 -282.85,93.965 cw(c-282.85,94.415) -282.851,93.965 cw(c-282.85,92.415) -282.85,93.965 -282.851,93.965 ccw(c-282.85,92.415) -284.4,92.416 cw(c-284.85,92.415) -284.4,92.415 -284.4,39.065 cw(c-284.85,39.065) -284.4,39.063 -284.4,2.215 ccw(c-282.85,2.215)
  pour cut-out: -95.95,-0.235 cw(c-95.95,0.215) -95.95,0.665 -15.45,0.665 cw(c-15.45,0.215) -15,0.215 cw(c-15.45,0.215) -15.45,-0.235
  pour cut-out: -8.758,0.288 ccw(c-12.294,-0.519) -15.841,0.242 ccw(c-15.716,0.215) -15.844,0.215 ccw(c-15.716,0.215) -15.716,0.088 -8.927,0.088 ccw(c-8.927,0.215) -8.817,0.15 ccw(c-8.882,0.26)
  pour cut-out: -95.558,0.288 ccw(c-99.094,-0.519) -102.641,0.242 ccw(c-102.516,0.215) -102.644,0.215 ccw(c-102.516,0.215) -102.516,0.088 -95.727,0.088 ccw(c-95.727,0.215) -95.617,0.15 ccw(c-95.682,0.26)
  pour cut-out: -182.358,0.288 ccw(c-185.894,-0.519) -189.441,0.242 ccw(c-189.316,0.215) -189.444,0.215 ccw(c-189.316,0.215) -189.316,0.088 -182.527,0.088 ccw(c-182.527,0.215) -182.417,0.15 ccw(c-182.482,0.26)
  pour cut-out: -269.158,0.288 ccw(c-272.694,-0.519) -276.241,0.242 ccw(c-276.116,0.215) -276.244,0.215 ccw(c-276.116,0.215) -276.116,0.088 -269.327,0.088 ccw(c-269.327,0.215) -269.217,0.15 ccw(c-269.282,0.26)
  pour cut-out: -276.23,94.342 ccw(c-272.694,95.149) -269.147,94.388 ccw(c-269.272,94.415) -269.144,94.415 ccw(c-269.272,94.415) -269.272,94.542 -276.061,94.542 ccw(c-276.061,94.415) -276.171,94.48 ccw(c-276.106,94.37)
  pour cut-out: -189.43,94.342 ccw(c-185.894,95.149) -182.347,94.388 ccw(c-182.472,94.415) -182.344,94.415 ccw(c-182.472,94.415) -182.472,94.542 -189.261,94.542 ccw(c-189.261,94.415) -189.371,94.48 ccw(c-189.306,94.37)
  pour cut-out: -102.63,94.342 ccw(c-99.094,95.149) -95.547,94.388 ccw(c-95.672,94.415) -95.544,94.415 ccw(c-95.672,94.415) -95.672,94.542 -102.461,94.542 ccw(c-102.461,94.415) -102.571,94.48 ccw(c-102.506,94.37)
  pour cut-out: -13.837,94.342 ccw(c-10.3,95.149) -6.754,94.388 ccw(c-6.878,94.415) -6.751,94.415 ccw(c-6.878,94.415) -6.878,94.542 -13.668,94.542 ccw(c-13.668,94.415) -13.777,94.48 ccw(c-13.713,94.37)
  pour cut-out: -13.837,94.342 ccw(c-10.3,95.149) -6.754,94.388 ccw(c-6.878,94.415) -6.751,94.415 ccw(c-6.878,94.415) -6.878,94.542 -13.668,94.542 ccw(c-13.668,94.415) -13.777,94.48 ccw(c-13.713,94.37)

## Silkscreen, mask and mechanical layers (free items; w line width, h text height)
Top Overlay:
  text "Rev A1" at -102.489,4.953 h1.25
Top Solder:
  drawing of 2 lines, arcs and shapes, not listed
outline:
  lines w0.1: 0.15,39.065 0.15,94.415 -27.46,94.415 -27.46,98.044 ; 0.15,39.37 0.15,0.215 -285.15,0.215 -285.15,94.415 -146.8,94.415 -146.8,100.295 -138.2,100.295 -138.2,94.415 -81.66,94.415 -81.66,100.245 -27.46,100.245 -27.46,98.044 ; -27.46,98.044 -27.46,98.044
  lines w0.254: -144.399,102.755 -140.462,102.755
Mechanical 2:
  drawing of 444 lines, arcs and shapes, not listed
  text "PROPHET" at -20.347,93.6 h0.5
Mechanical 16:
  drawing of 556 lines, arcs and shapes, not listed

## Dimensions
-81.66,94.415 to -79.629,93.472 on outline
-27.46,100.245 to -29.337,95.35 on outline
-27.46,100.245 to -43.815,104.013 on outline
-81.788,101.854 to -53.213,103.505 on outline

## Text inside footprints (layer, text, board x,y; h text height)
S260: Mechanical 16 "6.25U" at -188.764,5.615 h1.52 r270; Mechanical 16 "7U" at -208.331,7.365 h1.52 r270